# EAGLE board PAM2401_Tester (EAGLE 7.3.0)
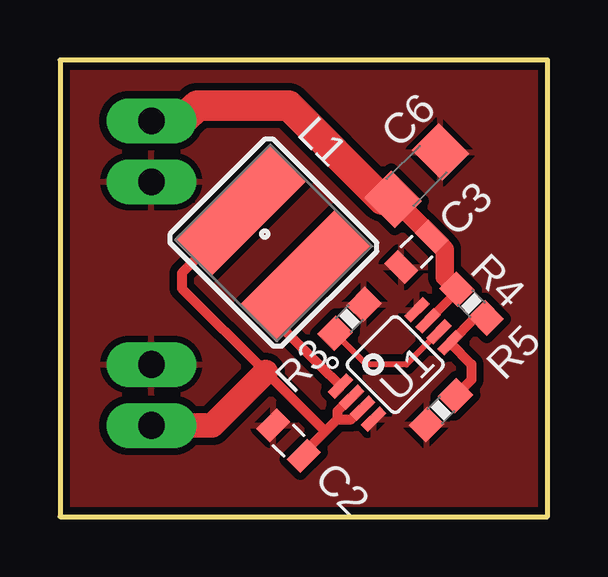
[diagram p0: board, top side]
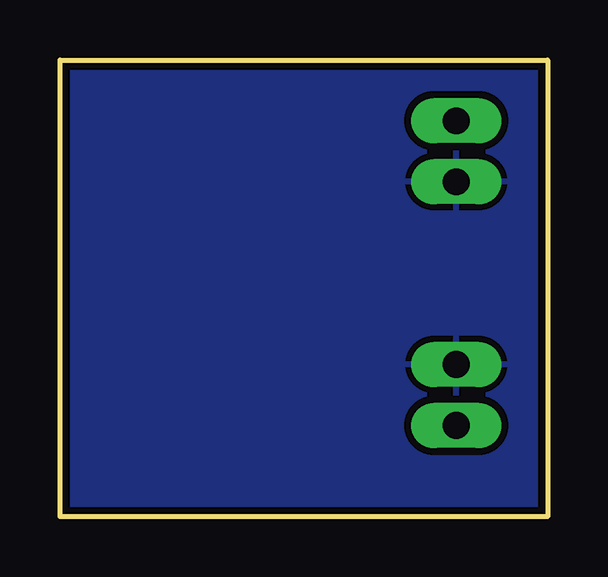
[diagram p1: board, bottom side, seen from below]

Size 20.32 x 19.05 mm. Coordinates in mm from the lower left corner, seen from the top.
Outline: 20.32,19.05 0,19.05 0,0 20.32,0 20.32,19.05
Copper layers (1*16): Top 0.035mm / dielectric 1.5mm / Bottom 0.035mm
Design rules "SparkFun-2-layer-TIGHT": minimum track width 7mil, minimum drill 15mil, track to track 7mil, track to pad 7mil, pad to pad 7mil, via to via 7mil, smd to smd 7mil, copper to edge 7mil, drill to drill 7mil, minimum pad ring 7mil, minimum via ring 7mil, stop-mask expansion 4mil, vias tented up to drill 25mil, thermal gap 10mil
Net classes: 0 default: width 0.152 mm, drill 0.305 mm, clearance 0.152 mm; 1 vcc: width 0.254 mm; 3 ButtonSignal: width 0.254 mm

## Footprints (pad centres in the part's own frame; a part is rotated, then mirrored left to right if it is on the bottom)
0805 = smd 0.8 x 1.2: 1 -0.9,0; 2 0.9,0
1206 = smd 1.6 x 1.8: 1 -1.4,0; 2 1.4,0
1X02_LONGPADS = drill 1.118 pad 1.88 long: 1 0,0; 2 2.54,0
CR54 = smd 5.5 x 2.15: P$1 0,1.92; P$2 0,-1.92
0603-RES = smd 1.1 x 1: 1 -0.85,0; 2 0.85,0
MSOP8 = smd 0.4 x 1.1: 1 -0.975,-2.25; 2 -0.325,-2.25; 3 0.325,-2.25; 4 0.975,-2.25; 5 0.975,2.25; 6 0.325,2.25; 7 -0.325,2.25; 8 -0.975,2.25

## Placement (x,y rotation side)
C2  22uF  [0805]  9.53,3.17 135 top
C3  22uF  [0805]  14.86,11.05 225 top
C6  [1206]  14.86,14.22 45 top
FRAME1  FRAME-LETTER  [CREATIVE_COMMONS]  -23.09,-38.43 0 top  (outside the outline)
JP1  M02PTH3  [1X02_LONGPADS]  3.81,16.51 270 top
JP2  M02PTH3  [1X02_LONGPADS]  3.81,6.35 270 top
L1  2.2uH  [CR54]  8.89,11.43 45 top
R3  100k  [0603-RES]  12.07,8.26 225 top
R4  750K  [0603-RES]  17.14,8.89 135 top
R5  100k  [0603-RES]  15.88,4.45 45 top
U1  PAM2401  [MSOP8]  13.97,6.35 315 top

## Library data of the parts
C2 C3 = SparkFun-Capacitors; PROD_ID: CAP-08402
C6 = SparkFun-Capacitors
FRAME1 = SparkFun-Aesthetics
JP1 JP2 = SparkFun-Connectors
L1 = SparkFun-Passives
R3-R5 = SparkFun-Resistors; PROD_ID: RES-00824
U1 = SparkFun-PowerIC

## Nets
+5V: C3.1 C6.1 JP1.1 R4.2 U1.7
+BATT_RAW: C2.1 JP2.2 L1.P$1 U1.2 U1.3
GND: C2.2 C3.2 C6.2 JP1.2 JP2.1 R3.1 R5.1 U1.4 U1.8
N$4: R3.2 U1.6
N$8: L1.P$2 U1.1
N$12: R4.1 R5.2 U1.5

## Tracks (layer width: path | path; a pad name or v marks a point on that pad's centre or on a via)
+5V
  Top 0.305: 16.54,9.38
  Top 0.381: U1.7 16.54,9.38 R4.2
  Top 0.762: R4.2 16.03,10.01 16.03,11.15 C3.1 13.95,13.23 C6.1
  Top 1.27: C6.1 13.44,13.23 9.53,17.14 5.71,17.14 5.08,16.51 JP1.1
+BATT_RAW
  Top 0.406: L1.P$1 7.53,12.61 5.08,10.16 5.08,9.53 8.57,6.03 10.99,3.62 10.99,3.49 | C2.1 10.29,2.54 10.29,2.79 10.99,3.49 | U1.2 11.56,4.4 11.56,4.06 | 11.56,4.06 12.14,4.06 U1.3 | 10.99,3.49 11.56,4.06
  Top 1.016: JP2.2 6.35,3.81 8.57,6.03
GND
  pour Top (isolate 0.305): 20.32,19.05 20.32,0 0,0 0,19.05
  pour Bottom (isolate 0.305): 20.32,19.05 0,19.05 0,0 20.32,0
N$4
  Top 0.254: U1.6 14.43,6.35 12.77,6.35 R3.2
N$8
  Top 0.406: U1.1 10.81,6.33 10.81,6.34 8.89,8.26 8.89,8.71 L1.P$2
N$12
  Top 0.406: R5.2 17.14,5.71 17.14,6.36 U1.5 17.29,8.29 R4.1

## Text on the board
tValues: Joel Bartlett